# EAGLE board Balancing Circuit Module (EAGLE 5.12)
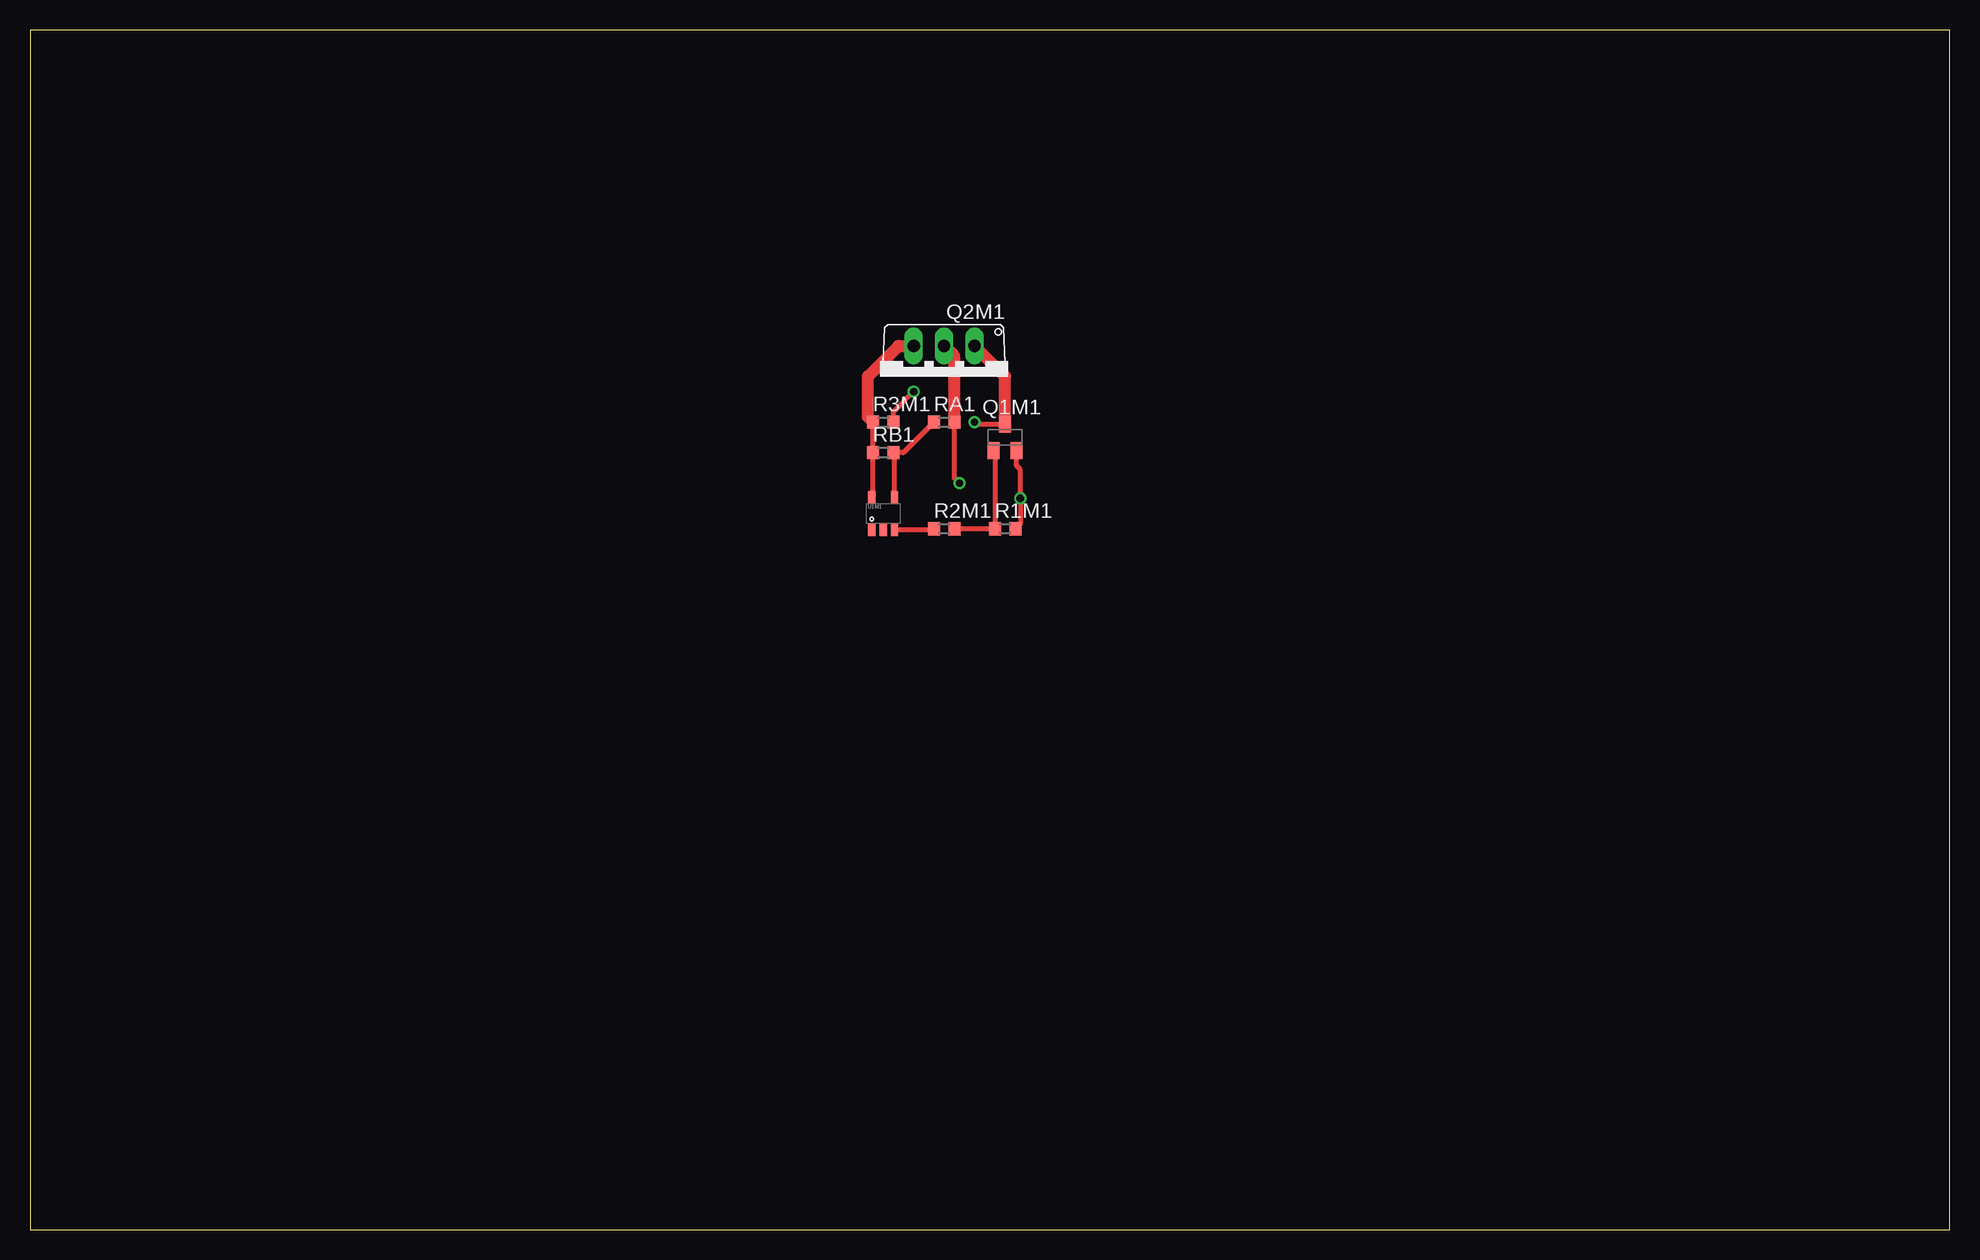
[diagram p0: board, top side]
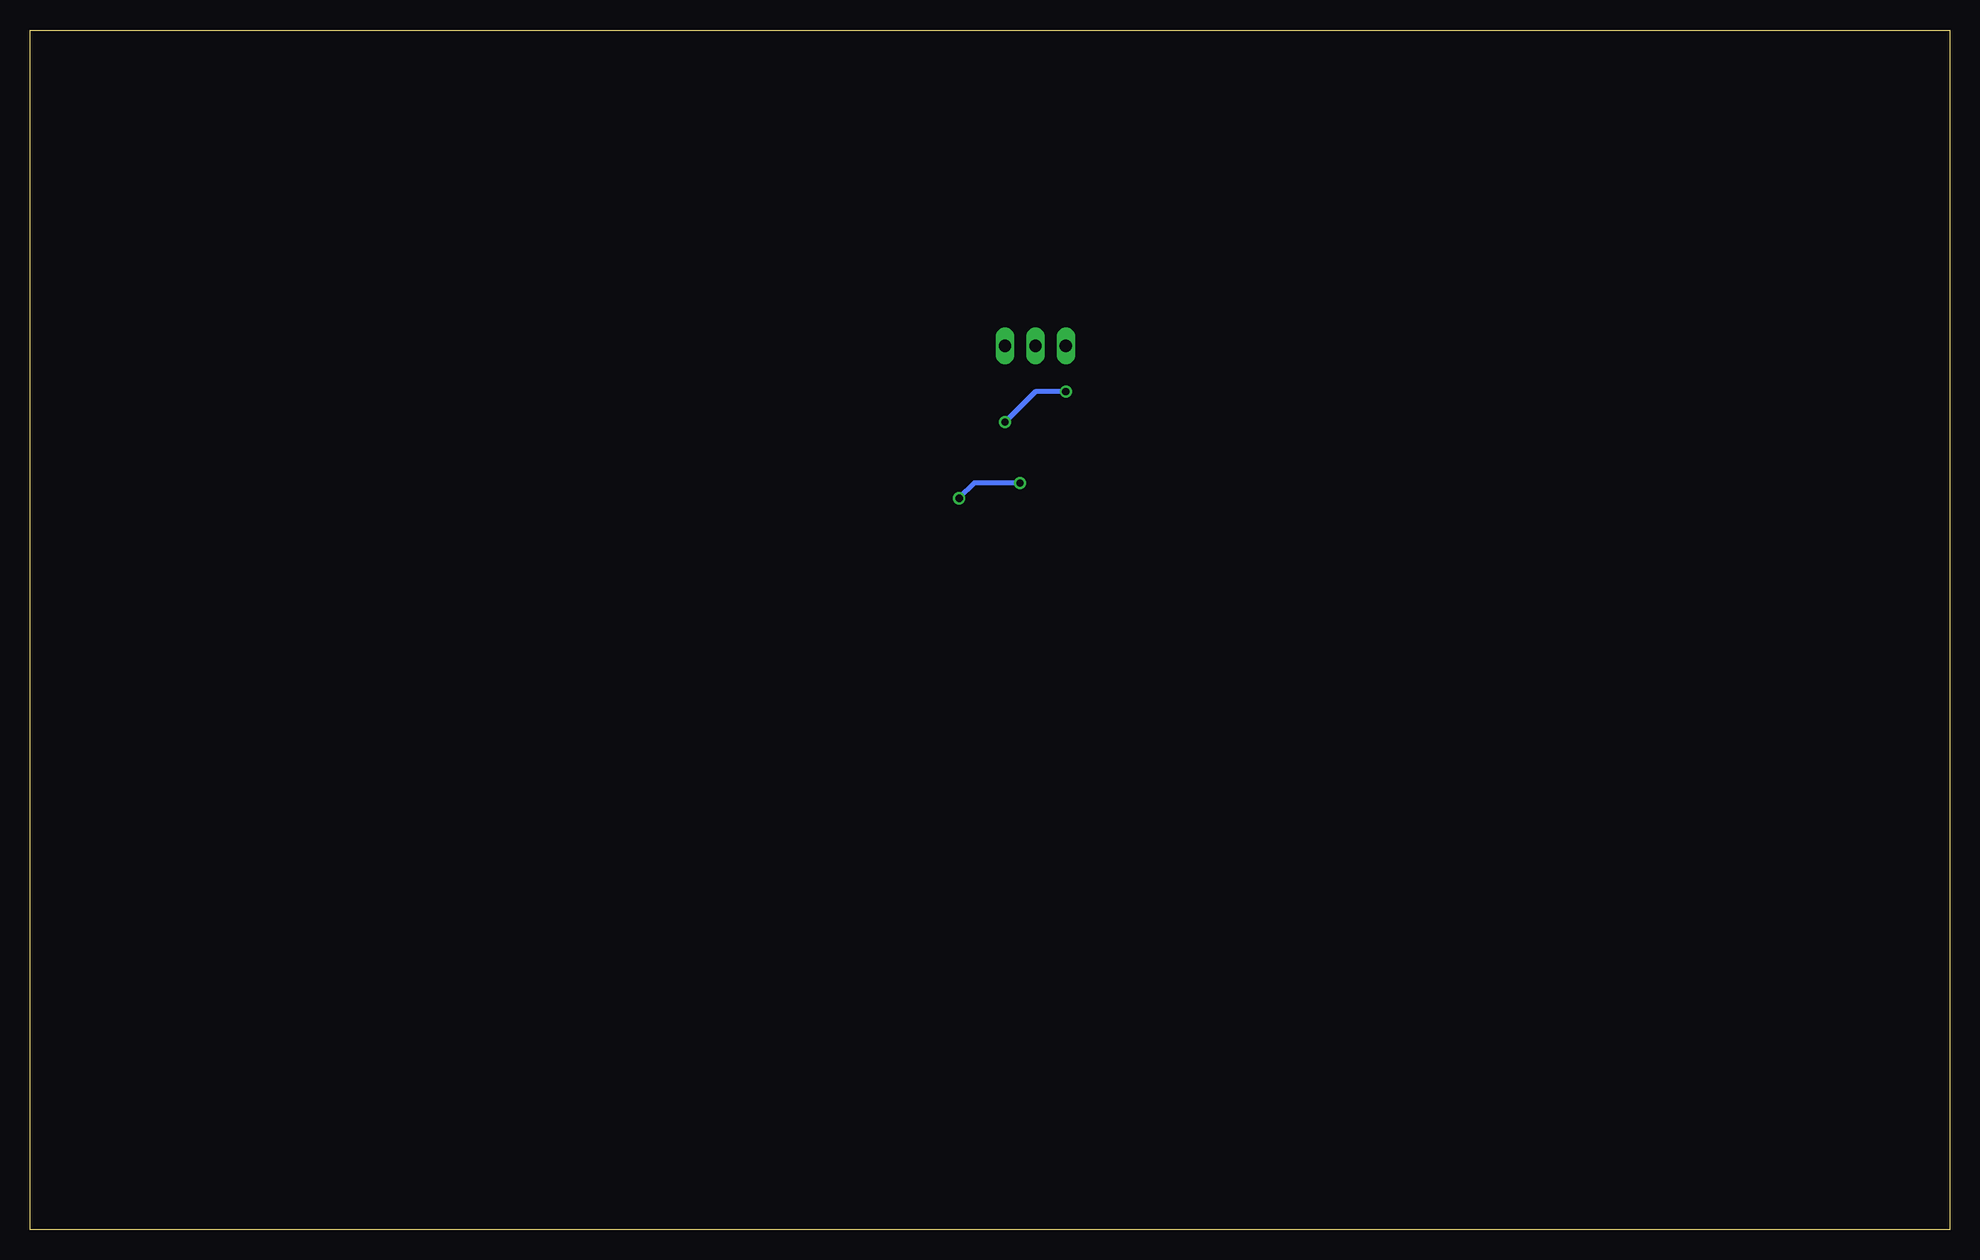
[diagram p1: board, bottom side, seen from below]

Size 160 x 100 mm. Coordinates in mm from the lower left corner, seen from the top.
Outline: 0,0 160,0 160,100 0,100 0,0
Copper layers (1*16): Top 0.035mm / dielectric 1.5mm / Bottom 0.035mm
Design rules "default": minimum track width 10mil, minimum drill 24mil, track to track 8mil, track to pad 8mil, pad to pad 8mil, via to via 8mil, smd to smd 8mil, copper to edge 40mil, drill to drill 8mil, minimum pad ring 10mil, minimum via ring 8mil, stop-mask expansion 4mil, vias tented up to drill 0mil, thermal gap 10mil

## Footprints (pad centres in the part's own frame; a part is rotated, then mirrored left to right if it is on the bottom)
SOT23-BEC = smd 1 x 1.4: B -0.95,-1.1; C 0,1.1; E 0.95,-1.1
TO220V = drill 1.016 long: 1 -2.54,-2.54; 2 0,-2.54; 3 2.54,-2.54
R0603 = smd 1 x 1.1: 1 -0.85,0; 2 0.85,0
SOT-23-5_(DBV-R-PDSO-G5) = smd 0.6 x 1.05: 1 -0.95,-1.35; 2 0,-1.35; 3 0.95,-1.35; 4 0.95,1.35; 5 -0.95,1.35

## Placement (x,y rotation side)
Q1M1  MMBT3906LT1SMD  [SOT23-BEC]  81.28,66.04 0 top
Q2M1  D44VH10  [TO220V]  76.2,71.12 180 top
R1M1  1k  [R0603]  81.28,58.42 0 top
R2M1  100  [R0603]  76.2,58.42 0 top
R3M1  1k  [R0603]  71.12,67.31 0 top
RA1  21.5k  [R0603]  76.2,67.31 0 top
RB1  10k  [R0603]  71.12,64.77 0 top
U1M1  TLV431  [SOT-23-5_(DBV-R-PDSO-G5)]  71.12,59.69 0 top

## Library data of the parts
Q1M1 = transistor-pnp
Q2M1 = transistor
R1M1 R2M1 R3M1 RA1 RB1 = resistor
U1M1 = TI

## Nets
N$1: Q1M1.C Q2M1.1 R3M1.2
N$2: Q1M1.B R1M1.1 R2M1.2
N$50: RA1.1 RB1.2 U1M1.4
N$56: R2M1.1 U1M1.3
VB1: Q2M1.3 R3M1.1 RB1.1 U1M1.5
VB2: Q1M1.E Q2M1.2 R1M1.2 RA1.2

## Tracks (layer width: path | path; a pad name or v marks a point on that pad's centre or on a via)
N$1  (via drill 0.6)
  Top 0.406: R3M1.2 71.97,68.16 v73.66,69.85 | v78.74,67.31 78.91,67.14 Q1M1.C
  Top 1.016: Q2M1.1 81.28,71.12 Q1M1.C
  Bottom 0.406: v73.66,69.85 76.2,69.85 v78.74,67.31
N$2
  Top 0.406: R2M1.2 R1M1.1 | R1M1.1 80.33,58.42 | Q1M1.B 80.43,64.84 R1M1.1
N$50
  Top 0.406: U1M1.4 72.07,64.77 RB1.2 72.81,64.77 RA1.1
N$56
  Top 0.406: U1M1.3 75.35,58.34 R2M1.1
VB1
  Top 0.406: U1M1.5 70.27,61.04 RB1.1 R3M1.1
  Top 1.016: R3M1.1 69.85,67.73 69.85,71.12 72.39,73.66 Q2M1.3
VB2  (via drill 0.6)
  Top 0.406: v77.47,62.23 77.05,62.65 RA1.2 | R1M1.2 82.55,58.84 v82.55,60.96 82.55,63.35 82.23,63.67 Q1M1.E
  Top 1.016: Q2M1.2 77.05,72.81 RA1.2
  Bottom 0.406: v82.55,60.96 81.28,62.23 v77.47,62.23